# EAGLE board trackduino micro (EAGLE 7.1.0)
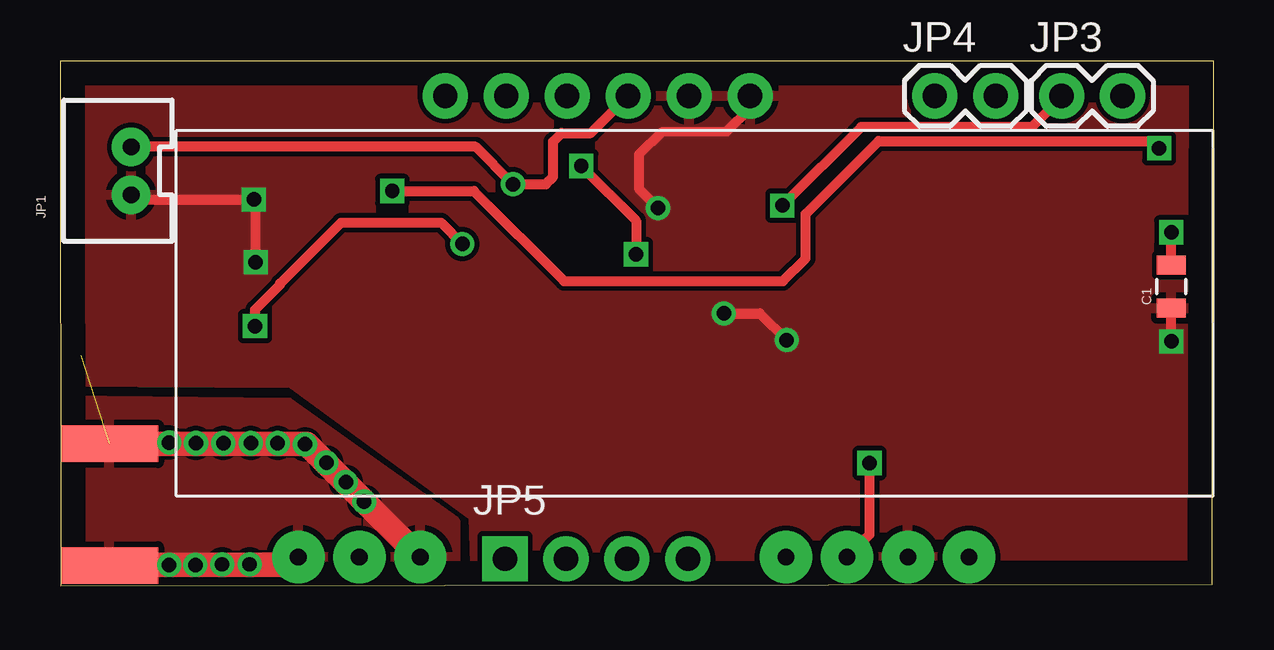
[diagram p0: board, top side]
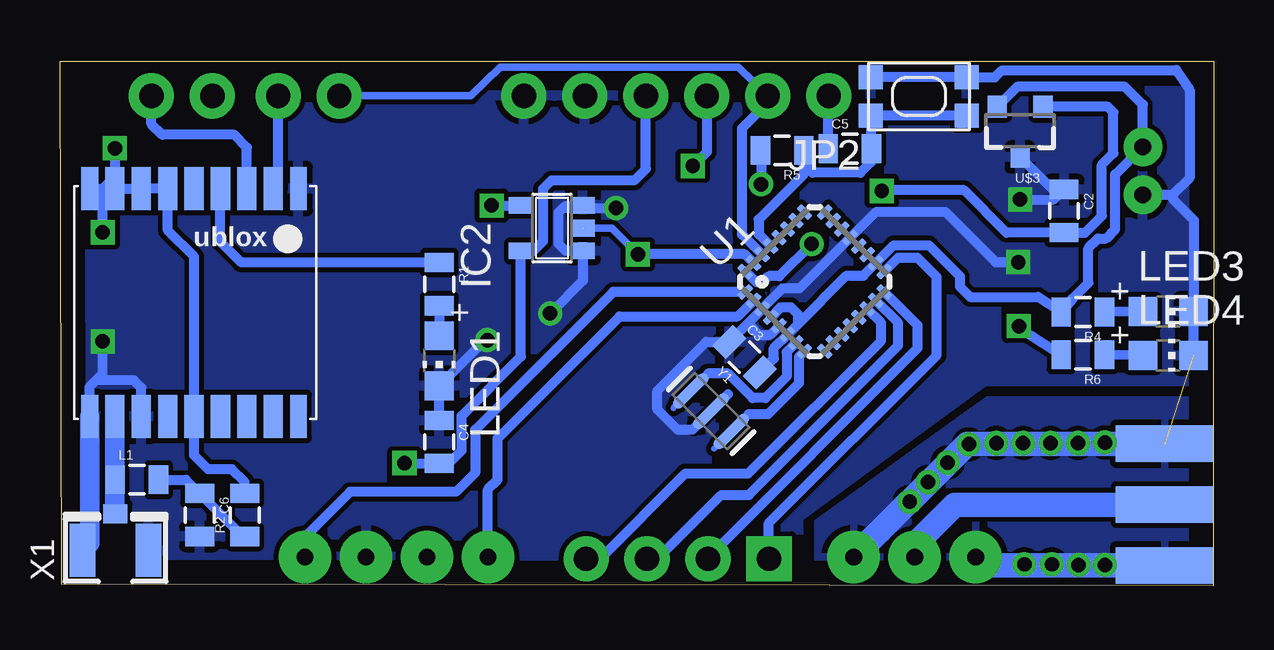
[diagram p1: board, bottom side, seen from below]

Size 48.08 x 21.86 mm. Coordinates in mm from the lower left corner, seen from the top.
Outline: 0.03,0 48.01,0.05 48.08,21.86 0,21.86 0.03,0
Copper layers (1*16): Top 0.035mm / dielectric 1.5mm / Bottom 0.035mm
Design rules "default": minimum track width 10mil, minimum drill 24mil, track to track 8mil, track to pad 8mil, pad to pad 8mil, via to via 8mil, smd to smd 8mil, copper to edge 40mil, drill to drill 8mil, minimum pad ring 10mil, minimum via ring 8mil, stop-mask expansion 4mil, vias tented up to drill 0mil, thermal gap 10mil

## Footprints (pad centres in the part's own frame; a part is rotated, then mirrored left to right if it is on the bottom)
0805 = smd 0.8 x 1.2: 1 -0.9,0; 2 0.9,0
SOT23-5 = smd 0.69 x 0.99: 1 -0.95,-1.29; 2 0,-1.29; 3 0.95,-1.29; 4 0.95,1.3; 5 -0.95,1.3
SMA-EDGE = smd 1.524 x 4.064: GND@0 0,0; GND@1 5.08,0; SIG 2.54,0 | smd 1.524 x 4.064 bottom: GND@2 0,0; GND@3 5.08,0
JST-2-PTH-VERT = drill 0.7 pad 1.6: 1 -1,-0.55; 2 1,-0.55
1X06_NO_SILK = drill 1.016 pad 1.88: 1 0,0; 2 2.54,0; 3 5.08,0; 4 7.62,0; 5 10.16,0; 6 12.7,0
1X02 = drill 1.016 pad 1.88: 1 0,0; 2 2.54,0
1X04_NO_SILK = drill 1.016 pad 1.88 square: 1 0,0 | drill 1.016 pad 1.88: 2 2.54,0; 3 5.08,0; 4 7.62,0
CHIP-LED0805 = smd 1.2 x 1.2: A 0,-1.05; C 0,1.05
KMR2 = smd 1 x 1: 1 2,0.8; 2 2,-0.8; 3 -2,0.8; 4 -2,-0.8
MLF32 = smd 0.7 x 0.3: 1 -2.35,1.75; 2 -2.35,1.25; 3 -2.35,0.75; 4 -2.35,0.25; 5 -2.35,-0.25; 6 -2.35,-0.75; 7 -2.35,-1.25; 8 -2.35,-1.75; 17 2.35,-1.75; 18 2.35,-1.25; 19 2.35,-0.75; 20 2.35,-0.25; 21 2.35,0.25; 22 2.35,0.75; 23 2.35,1.25; 24 2.35,1.75 | smd 0.3 x 0.7: 9 -1.75,-2.35; 10 -1.25,-2.35; 11 -0.75,-2.35; 12 -0.25,-2.35; 13 0.25,-2.35; 14 0.75,-2.35; 15 1.25,-2.35; 16 1.75,-2.35; 25 1.75,2.35; 26 1.25,2.35; 27 0.75,2.35; 28 0.25,2.35; 29 -0.25,2.35; 30 -0.75,2.35; 31 -1.25,2.35; 32 -1.75,2.35
UBLOX_MAX = smd 1.8 x 0.7: 1_GND 4.95,-4.4; 9_V_RESET 4.95,4.3; 10_GND -4.55,4.3; 18_RESERVED -4.55,-4.4 | smd 1.8 x 0.8: 2_TXD1 4.95,-3.35; 3_RXD1 4.95,-2.25; 4_TIMEPULSE 4.95,-1.15; 5_EXTINT0 4.95,-0.05; 6_V_BCKP 4.95,1.05; 7_VCC_IO 4.95,2.15; 8_VCC 4.95,3.25; 11_RF_IN -4.55,3.25; 12_GND -4.55,2.15; 13_ANTON -4.55,1.05; 14_VCC_RF -4.55,-0.05; 15_RESERVED -4.55,-1.15; 16_SDA2 -4.55,-2.25; 17_SCL2 -4.55,-3.35
RADIOMETRIX-HX1 = drill 0.7 pad 2.184: 0V 8.89,-10.16; EN 3.81,-10.16; RFGND -11.43,-10.16; RFGND2 -16.51,-10.16; RFOUT -13.97,-10.16; TXD 11.43,-10.16; VCC 6.35,-10.16
SOT23-3 = smd 0.8 x 0.9: 1 -0.95,-1; 2 0.95,-1; 3 0,1.1
U.FL = smd 2.2 x 1.05: 1 0,1.375; 2 0,-1.375 | smd 0.8 x 1: 3 1.525,0
RESONATOR-SMD = smd 0.45 x 1.905: 1 -1.2,0; 2 0,0; 3 1.2,0

## Placement (x,y rotation side)
C1  [0805]  46.3,12.47 90 top
C2  [0805]  6.25,15.62 270 bottom
C3  [0805]  19.56,9.52 315 bottom
C4  [0805]  32.28,5.99 270 bottom
C5  [0805]  15.17,18.22 0 bottom
C6  [0805]  42.27,2.95 270 bottom
FRAME1  FRAME-LETTER  [CREATIVE_COMMONS]  19.13,-8.1 0 top  (outside the outline)
IC2  74AHC1G125DBV  [SOT23-5]  27.58,14.91 90 bottom
J$1  SMA_EDGE  [SMA-EDGE]  2.06,0.84 90 bottom
JP1  M02JST-PTH-VERT  [JST-2-PTH-VERT]  2.41,17.3 90 top
JP2  [1X06_NO_SILK]  16.05,20.42 180 bottom
JP3  M02PTH  [1X02]  41.73,20.42 0 top
JP4  M02PTH  [1X02]  36.45,20.42 0 top
JP5  [1X04_NO_SILK]  18.54,1.12 0 top
L1  [0805]  44.88,4.42 0 bottom
LED1  [CHIP-LED0805]  32.28,9.37 180 bottom
LED3  [CHIP-LED0805]  1.91,11.43 270 bottom
LED4  [CHIP-LED0805]  1.91,9.6 270 bottom
R1  [0805]  32.28,12.57 270 bottom
R2  [0805]  40.39,2.95 90 bottom
R4  [0805]  5.46,11.4 180 bottom
R5  [0805]  18,18.15 180 bottom
R6  [0805]  5.46,9.63 180 bottom
SW1  SPST_TACT-KMR2  [KMR2]  12.29,20.4 180 bottom
U1  ATMEGA168MLF  [MLF32]  16.64,12.67 45 bottom
U$1  UBLOX_MAX  [UBLOX_MAX]  42.55,11.61 90 bottom
U$2  RADIOMETRIX-HX1  [RADIOMETRIX-HX1]  26.44,11.35 0 top
U$3  LM3480IM4  [SOT23-3]  8.08,18.97 180 bottom
X1  [U.FL]  45.77,1.47 90 bottom
Y1  16MHZ  [RESONATOR-SMD]  20.96,7.27 315 bottom

## Library data of the parts
C1-C6 = SparkFun-Capacitors
FRAME1 = SparkFun-Aesthetics
IC2 = 74xx-little-us
J$1 JP1 JP3-JP5 = SparkFun-Connectors
JP2 = SparkFun-Connectors; PROD_ID: CONN-08437
L1 = SparkFun-Passives
LED1 LED3 LED4 SW1 X1 = adafruit
R1 R2 R4-R6 = SparkFun-Resistors
U1 = SparkFun-DigitalIC
U$1 U$2 = Ava
U$3 = SparkFun-PowerIC
Y1 = SparkFun-FreqCtrl; PROD_ID: XTAL-08900

## Nets
3V: C1.2 C2.2 R2.2 U$1.6_V_BCKP U$1.7_VCC_IO U$1.8_VCC U$1.9_V_RESET U$1.14_VCC_RF U$3.1
D3: U1.1 U$2.TXD
D4: U1.2 U$2.EN
DTR: C5.1 JP2.1
GND: C1.1 C2.1 C3.1 C4.1 C6.2 IC2.1 IC2.3 J$1.GND@0 J$1.GND@1 J$1.GND@2 J$1.GND@3 JP1.1 JP2.5 JP2.6 LED1.C LED3.C LED4.C SW1.2 SW1.4 U1.3 U1.5 U1.21 U$1.1_GND U$1.10_GND U$1.12_GND U$2.0V U$2.RFGND U$2.RFGND2 U$3.3 X1.1 X1.2 Y1.2
LED: R6.2 U1.32
MISO: JP5.2 U1.16
MOSI: JP5.3 U1.15
N$1: J$1.SIG U$2.RFOUT
N$2: R1.1 U$1.4_TIMEPULSE
N$3: LED1.A R1.2
N$6: L1.1 U$1.11_RF_IN X1.3
N$8: LED3.A R4.1
N$9: C5.2 R5.1 SW1.1 SW1.3 U1.29
N$14: U1.8 Y1.3
N$24: C6.1 L1.2 R2.1
N$26: U1.7 Y1.1
N$27: LED4.A R6.1
RX: JP3.2 U$1.3_RXD1
RXO: JP2.2 JP4.1 U1.30
SCK: JP5.1 U1.17
SS: JP5.4 U1.14
TX: JP4.2 U$1.2_TXD1
TX1: IC2.4 JP3.1
TXO: IC2.2 JP2.3 U1.31
VCC: C3.2 C4.2 IC2.5 JP1.2 JP2.4 R4.2 R5.2 U1.4 U1.6 U1.18 U$2.VCC U$3.2

## Tracks (layer width: path | path; a pad name or v marks a point on that pad's centre or on a via)
3V  (via drill 0.6)
  Top 0.406: v13.84,16.46 17.25,16.46 21.01,12.7 30.12,12.7 31.06,13.64 31.06,15.49 34.11,18.54 45.49,18.54 v45.8,18.24 | C1.2 v46.3,14.73
  Bottom 0.406: 6.23,14.66 C2.2 | U$1.9_V_RESET 46.3,16.56 | 46.3,16.56 U$1.8_VCC U$1.7_VCC_IO U$1.6_V_BCKP 43.59,14.81 42.49,13.72 U$1.14_VCC_RF 42.52,7.03 42.52,6.48 42.49,6.45 42.49,5.44 41.91,4.85 40.92,4.85 40.39,4.32 R2.2 | C2.2 5.37,14.72 4.67,15.42 4.67,17.55 4.19,18.03 4.19,19.74 4.42,19.96 7.12,19.96 U$3.1 | C2.2 8.65,14.72 10.41,16.48 13.82,16.48 v13.84,16.46 | v45.8,18.24 45.8,17.07 46.3,16.56 | v46.3,14.73 46.3,16.56
D3
  Bottom 0.406: U1.1 25.04,12.25 30.78,6.5 30.78,4.7 31.57,3.91 35.99,3.91 37.87,2.03 U$2.TXD
D4
  Bottom 0.406: U$2.EN 30.25,4.01 29.84,4.42 29.84,6.15 24.76,11.23 19.85,11.23 U1.2
DTR
  Bottom 0.406: C5.1 16.07,20.4 JP2.1
GND  (via drill 0.6)  (1 unrouted)
  Top 0.406: JP1.1 3.51,16.1 v8.08,16.1 8.15,16.03 v8.15,13.49 | v27.66,11.35 29.16,11.35 v30.28,10.24 | v24.92,15.75 24.13,16.54 24.13,17.98 25.1,18.92 27.79,18.95 28.75,19.91 JP2.6 | v46.3,10.19 C1.1
  Top 1.016: U$2.RFGND2 9.6,0.86 v5.64,0.86 v4.55,0.86 2.08,0.86 J$1.GND@2 | J$1.GND@1 10.29,5.92 15.04,1.17
  Bottom 0.406: 19.33,11.03 18.83,11.53 U1.3 17.98,12.4 17.27,12.4 U1.21 14.07,15.6 11.2,15.6 9.09,13.49 v8.15,13.49 | 19.33,11.03 C3.1 21.16,10.16 23.19,8.13 23.19,7.34 22.35,6.5 21.73,6.5 20.24,7.99 | U1.5 18.52,10.44 18.95,10.44 19.33,10.82 19.33,11.03 | JP1.1 1.72,16.3 | LED4.C LED3.C 0.83,12.01 0.84,12.02 0.84,15.24 1.72,16.12 1.72,16.3 | 27.05,15.82 27.3,15.57 27.3,14.25 27.02,13.96 IC2.1 26.29,12.72 v27.66,11.35 | 27.05,15.82 26.33,15.82 IC2.3 | C4.1 LED1.C 30.37,10.24 v30.28,10.24 | U$1.12_GND 44.69,8.25 45.01,8.56 46.58,8.56 | 46.58,8.56 46.86,8.28 46.86,7.08 U$1.10_GND | SW1.2 SW1.4 9.13,21.2 8.84,21.49 1.56,21.5 1.02,20.68 1.02,17 1.72,16.3 | 27.05,15.82 26.97,15.75 v24.92,15.75 | 46.58,8.56 46.3,8.84 v46.3,10.19 | U$3.3 6.67,16.47 C2.1 6.67,16.1 v8.08,16.1
  Bottom 0.813: U$1.10_GND 46.84,1.77 X1.1
  Bottom 1.016: J$1.GND@1 10.29,5.92 U$2.RFGND | J$1.GND@2 9.58,0.84 U$2.RFGND2
  pour Top: 0,22.61 48.08,22.53 48.08,-0.46 17.35,-0.43 17.25,2.87 9.63,8.43 0.03,8.48
  pour Bottom: 0.03,22.56 48.06,22.5 48.06,-0.48 17.45,-0.43 17.3,-0.28 17.3,2.84 9.52,8.53 0,8.53
  pour Top: 0.05,7.75 9.52,7.65 16.46,2.69 16.46,-0.43 0.05,-0.33
  pour Bottom: -0.03,7.75 9.42,7.75 16.51,2.64 16.51,-0.41 0.08,-0.43
LED  (via drill 0.6)
  Top 0.406: v8.13,10.82 8.13,11.51 9.17,12.55 9.17,12.6 11.71,15.14 15.87,15.14 v16.76,14.25
  Bottom 0.406: R6.2 7.87,10.57 v8.13,10.82 | v16.76,14.25 18.11,12.9 18.54,12.9 18.8,12.65 19.05,12.65 19.5,13.1 U1.32
MISO
  Bottom 0.406: JP5.2 21.08,1.17 12.34,9.91 12.34,10.86 U1.16
MOSI
  Bottom 0.406: JP5.3 23.19,1.12 20.52,3.78 19.38,3.78 13.16,10.01 13.16,10.96 U1.15
N$1
  Bottom 1.016: J$1.SIG 10.79,3.38 12.47,1.7 U$2.RFOUT
N$2
  Bottom 0.406: R1.1 40.52,13.47 41.4,14.35 U$1.4_TIMEPULSE
N$3
  Bottom 0.406: R1.2 LED1.A
N$6
  Bottom 0.406: L1.1 45.78,3.59 45.79,3.58
  Bottom 0.813: U$1.11_RF_IN 45.79,3.58 45.79,3.02 X1.3
N$8
  Bottom 0.406: LED3.A R4.1
N$9
  Bottom 0.406: SW1.3 SW1.1 14.29,18.25 | 14.29,18.25 C5.2 | 14.29,18.25 14.29,17.66 14.73,17.22 16.74,17.22 17.12,17.6 17.12,18.13 R5.1 17.1,17.14 18.97,15.27 18.97,14.66 U1.29
N$12  (via drill 0.6)
  other vias: 4.55,5.97
N$13  (via drill 0.6)
  other vias: 5.66,5.94
N$14
  Bottom 0.406: U1.8 17.3,9.54 17.3,8.43 18.59,7.14 19.39,7.14
N$17  (via drill 0.6)
  other vias: 6.81,5.94
N$18  (via drill 0.6)
  other vias: 7.95,5.94
N$19  (via drill 0.6)
  other vias: 9.07,5.94
N$20  (via drill 0.6)
  other vias: 10.21,5.89
N$21  (via drill 0.6)
  other vias: 11.1,5.13
N$22  (via drill 0.6)
  other vias: 11.91,4.32
N$23  (via drill 0.6)
  other vias: 12.67,3.51
N$24
  Bottom 0.406: L1.2 42.84,4.42 C6.1 40.47,2.05 R2.1
N$25  (via drill 0.6)
  other vias: 6.76,0.89
N$26
  Bottom 0.406: U1.7 17.81,9.74 17.81,8.71 18.69,7.82 19.23,7.82 20.25,8.84 21.09,8.84
N$27
  Bottom 0.406: LED4.A R6.1
N$28  (via drill 0.6)
  other vias: 7.9,0.89
RX
  Bottom 0.406: U$1.3_RXD1 40.29,18.27 40.82,18.8 43.81,18.8 44.27,19.25 JP3.2
RXO
  Bottom 0.305: JP4.1 30.96,20.42 29.74,21.62 19.81,21.62 JP2.2
  Bottom 0.406: U1.30 19.66,14.64 19.66,19.08 18.59,20.14 JP2.2
SCK
  Bottom 0.406: JP5.1 18.54,2.62 11.56,9.6 11.56,12.88 12.34,13.67 13.17,13.67 U1.17
SS
  Bottom 0.406: JP5.4 25.58,1.12 22.02,4.67 19.41,4.67 13.87,10.21 13.87,10.97 U1.14
TX
  Bottom 0.406: U$1.2_TXD1 38.99,16.56 JP4.2
TX1  (via drill 0.6)
  Top 0.406: JP3.1 41.73,20.37 40.49,19.13 33.38,19.13 v30.1,15.85
  Bottom 0.406: v30.1,15.85 IC2.4
TXO  (via drill 0.6)
  Top 0.406: v21.72,17.5 24,15.21 v24,13.82
  Bottom 0.305: IC2.2 25.1,14.91 v24,13.82
  Bottom 0.406: JP2.3 21.13,18.09 v21.72,17.5 | U1.31 19.55,13.82 v24,13.82
VCC  (via drill 0.6)
  Top 0.406: U$2.VCC 33.73,2.13 v33.73,5.11 | JP1.2 17.31,18.3 v18.87,16.74 20.24,16.74 20.55,17.04 20.55,18.52 20.9,18.87 22.12,18.87 JP2.4
  Bottom 0.406: C3.2 18.34,9.47 18.34,9.91 U1.6 | U1.6 | U1.6 17.35,10.9 | 17.35,10.9 15.32,12.93 14.6,12.93 14.09,13.44 | 14.09,13.44 U1.18 | U1.4 18.06,11.61 17.63,11.61 17.35,11.33 17.35,10.9 | 14.09,13.44 13.33,14.2 11.89,14.2 10.59,12.9 10.59,12.47 10.16,12.04 7.33,12.04 R4.2 5.87,11.99 5.23,12.62 5.23,14.07 4.83,14.48 4.5,14.48 4.11,14.86 4.11,17.15 JP1.2 2.96,20.06 3.71,20.8 8.2,20.8 U$3.2 | v33.73,5.11 33.72,5.09 C4.2 31.89,5.09 31.34,5.64 31.34,7.09 28.88,9.55 IC2.5 28.36,13.96 27.97,14.35 27.97,16.54 27.61,16.89 24.16,16.89 23.67,17.37 JP2.4 | R5.2 18.87,18.12 v18.87,16.74